# EAGLE board CT_schematic (EAGLE 7.6.0)

Size 100 x 80 mm. Coordinates in mm from the lower left corner, seen from the top.
Outline: 0,0 100,0 100,80 0,80 0,0
Copper layers (1*16): Top 0.035mm / dielectric 1.5mm / Bottom 0.035mm
Design rules "default": minimum track width 10mil, minimum drill 24mil, track to track 8mil, track to pad 8mil, pad to pad 8mil, via to via 8mil, smd to smd 8mil, copper to edge 40mil, drill to drill 8mil, minimum pad ring 10mil, minimum via ring 8mil, stop-mask expansion 4mil, vias tented up to drill 0mil, thermal gap 10mil

## Footprints (pad centres in the part's own frame; a part is rotated, then mirrored left to right if it is on the bottom)
C0603 = smd 0.8 x 0.8: 1 -0.762,0; 2 0.762,0
C0402 = smd 0.5 x 0.5: 1 -0.508,0; 2 0.508,0
EXV-9B = smd 2.718 x 1.778: 1 -2.108,0; 2 2.108,0
EXV-9H = smd 3.505 x 1.676: 1 -2.857,0; 2 2.857,0
L0603 = smd 0.8 x 0.8: 1 -0.762,0; 2 0.762,0
PJ-037B_PACKAGE = drill 3.7 square: 1 12,0 | drill 3.2 square: 2 6,0
R0603 = smd 0.8 x 0.8: 1 -0.762,0; 2 0.762,0
LQFP64 = smd 0.3 x 1.2: 1 -3.75,-5.75; 2 -3.25,-5.75; 3 -2.75,-5.75; 4 -2.25,-5.75; 5 -1.75,-5.75; 6 -1.25,-5.75; 7 -0.75,-5.75; 8 -0.25,-5.75; 9 0.25,-5.75; 10 0.75,-5.75; 11 1.25,-5.75; 12 1.75,-5.75; 13 2.25,-5.75; 14 2.75,-5.75; 15 3.25,-5.75; 16 3.75,-5.75; 33 3.75,5.75; 34 3.25,5.75; 35 2.75,5.75; 36 2.25,5.75; 37 1.75,5.75; 38 1.25,5.75; 39 0.75,5.75; 40 0.25,5.75; 41 -0.25,5.75; 42 -0.75,5.75; 43 -1.25,5.75; 44 -1.75,5.75; 45 -2.25,5.75; 46 -2.75,5.75; 47 -3.25,5.75; 48 -3.75,5.75 | smd 1.2 x 0.3: 17 5.75,-3.75; 18 5.75,-3.25; 19 5.75,-2.75; 20 5.75,-2.25; 21 5.75,-1.75; 22 5.75,-1.25; 23 5.75,-0.75; 24 5.75,-0.25; 25 5.75,0.25; 26 5.75,0.75; 27 5.75,1.25; 28 5.75,1.75; 29 5.75,2.25; 30 5.75,2.75; 31 5.75,3.25; 32 5.75,3.75; 49 -5.75,3.75; 50 -5.75,3.25; 51 -5.75,2.75; 52 -5.75,2.25; 53 -5.75,1.75; 54 -5.75,1.25; 55 -5.75,0.75; 56 -5.75,0.25; 57 -5.75,-0.25; 58 -5.75,-0.75; 59 -5.75,-1.25; 60 -5.75,-1.75; 61 -5.75,-2.25; 62 -5.75,-2.75; 63 -5.75,-3.25; 64 -5.75,-3.75
SOIC-8 = smd 1.6 x 0.6: 1 -2.7,1.905 | smd 1.55 x 0.6: 2 -2.7,0.635; 3 -2.7,-0.635; 4 -2.7,-1.905; 5 2.7,-1.905; 6 2.7,-0.635; 7 2.7,0.635; 8 2.7,1.905
TST-110-05-T-D-RA = drill 1 pad 1.7 square: 1 0,0 | drill 1 pad 1.7: 2 0,2.54; 3 2.54,0; 4 2.54,2.54; 5 5.08,0; 6 5.08,2.54; 7 7.62,0; 8 7.62,2.54; 9 10.16,0; 10 10.16,2.54; 11 12.7,0; 12 12.7,2.54; 13 15.24,0; 14 15.24,2.54; 15 17.78,0; 16 17.78,2.54; 17 20.32,0; 18 20.32,2.54; 19 22.86,0; 20 22.86,2.54
ABS07-32.768KHZ-7-T = smd 1.1 x 2.4: 1 -2.5,0; 2 0,0
ABLS-25.000MHZ-B2F-T = smd 5.6 x 2.8: 1 -3.81,0; 2 5.69,0
LP2954 = smd 1.6 x 0.6: 1 -2.475,1.905 | smd 1.55 x 0.6: 2 -2.475,0.635; 3 -2.475,-0.635; 4 -2.475,-1.905; 5 2.475,-1.905; 6 2.475,-0.635; 7 2.475,0.635; 8 2.475,1.905
SON-6 = smd 0.55 x 0.3: 1 -0.355,0.5 | smd 0.52 x 0.3: 2 -0.37,0; 3 -0.37,-0.5; 4 0.37,-0.5; 5 0.37,0; 6 0.37,0.5
SW_4-1437565-2 = smd 1.4 x 2.1: 1 -2.23,4.55; 2 -2.23,-4.55; 3 2.23,4.55; 4 2.23,-4.55
LGM67K-G1J2-24-Z = smd 0.8 x 1.4: A -2,0; C 0,0
NC7SZ125M5X = smd 1.3 x 0.7: 1 -1.3,0.95; 2 -1.3,0; 3 -1.3,-0.95; 4 1.3,-0.95; 5 1.3,0.95

## Placement (x,y rotation side)
C1  1e-07  [C0603]  -53.34,57.15 0 top  (outside the outline)
C2  1e-07  [C0603]  -57.15,57.15 0 top  (outside the outline)
C3  1e-07  [C0603]  -60.96,57.15 0 top  (outside the outline)
C4  1e-07  [C0603]  -15.24,62.23 0 top  (outside the outline)
C5  4.7e-06  [C0603]  -49.53,57.15 0 top  (outside the outline)
C6  1e-07  [C0603]  -19.05,62.23 0 top  (outside the outline)
C7  1e-08  [C0603]  -22.86,62.23 0 top  (outside the outline)
C8  1e-06  [C0603]  -26.67,62.23 0 top  (outside the outline)
C9  1e-11  [C0402]  -45.72,62.23 0 top  (outside the outline)
C10  1e-11  [C0402]  -49.53,62.23 0 top  (outside the outline)
C11  1e-11  [C0402]  -53.34,62.23 0 top  (outside the outline)
C12  1e-11  [C0402]  -57.15,62.23 0 top  (outside the outline)
C13  1e-08  [C0402]  -60.96,62.23 0 top  (outside the outline)
C14  1e-07  [C0402]  -15.24,67.31 0 top  (outside the outline)
C15  1e-07  [C0402]  -19.05,67.31 0 top  (outside the outline)
C16  1e-06  [EXV-9B]  -30.48,44.45 0 top  (outside the outline)
C17  2.2e-06  [EXV-9B]  -39.37,44.45 0 top  (outside the outline)
C18  1e-07  [C0402]  -22.86,67.31 0 top  (outside the outline)
C19  0.0001  [EXV-9H]  -54.61,30.48 0 top  (outside the outline)
C20  0.0001  [EXV-9H]  -17.78,38.1 0 top  (outside the outline)
C21  1e-08  [C0402]  -26.67,67.31 0 top  (outside the outline)
C22  1e-08  [C0402]  -30.48,67.31 0 top  (outside the outline)
F1  240.0  [L0603]  -30.48,62.23 0 top  (outside the outline)
J1  PJ-037B  [PJ-037B_PACKAGE]  -27.94,7.62 0 top  (outside the outline)
R2  1000.0  [R0603]  -34.29,62.23 0 top  (outside the outline)
R4  4700.0  [R0603]  -38.1,62.23 0 top  (outside the outline)
R5  10000.0  [R0603]  -40.64,52.07 0 top  (outside the outline)
R6  10000.0  [R0603]  -45.72,52.07 0 top  (outside the outline)
R7  10000.0  [R0603]  -50.8,52.07 0 top  (outside the outline)
R8  10000.0  [R0603]  -55.88,52.07 0 top  (outside the outline)
R9  10000.0  [R0603]  -60.96,52.07 0 top  (outside the outline)
R10  10000.0  [R0603]  -15.24,57.15 0 top  (outside the outline)
R11  10000.0  [R0603]  -20.32,57.15 0 top  (outside the outline)
R12  10000.0  [R0603]  -25.4,57.15 0 top  (outside the outline)
R13  10000.0  [R0603]  -30.48,57.15 0 top  (outside the outline)
R14  10000.0  [R0603]  -35.56,57.15 0 top  (outside the outline)
R15  100000.0  [R0603]  -15.24,52.07 0 top  (outside the outline)
R16  100000.0  [R0603]  -20.32,52.07 0 top  (outside the outline)
R17  164658.62  [R0603]  -60.96,44.45 0 top  (outside the outline)
R18  100000.0  [R0603]  -25.4,52.07 0 top  (outside the outline)
R19  10000.0  [R0603]  -40.64,57.15 0 top  (outside the outline)
R20  10000.0  [R0603]  -45.72,57.15 0 top  (outside the outline)
R21  9100.0  [R0603]  -41.91,62.23 0 top  (outside the outline)
R22  680000.0  [R0603]  -30.48,52.07 0 top  (outside the outline)
R23  120000.0  [R0603]  -35.56,52.07 0 top  (outside the outline)
U1  STM32L152RCT6  [LQFP64]  -40.64,7.62 0 top  (outside the outline)
U2  AT25128B-SSHL-T  [SOIC-8]  -60.96,19.05 0 top  (outside the outline)
U3  TST-110-05-T-D-RA  [TST-110-05-T-D-RA]  -46.99,27.94 0 top  (outside the outline)
U4  ABS07-32.768KHZ-7-T  [ABS07-32.768KHZ-7-T]  -59.69,38.1 0 top  (outside the outline)
U5  ABLS-25.000MHZ-B2F-T  [ABLS-25.000MHZ-B2F-T]  -36.83,38.1 0 top  (outside the outline)
U6  LP2954AIMX/NOPB  [LP2954]  -44.45,19.05 0 top  (outside the outline)
U7  TPS3895ADRYR  [SON-6]  -33.02,66.04 0 top  (outside the outline)
U8  4-1437565-2  [SW_4-1437565-2]  -27.94,20.32 0 top  (outside the outline)
U9  Q65110A2395  [LGM67K-G1J2-24-Z]  -17.78,45.72 0 top  (outside the outline)
U10  nc7sz125m5x  [NC7SZ125M5X]  -46.99,44.45 0 top  (outside the outline)
U11  nc7sz125m5x  [NC7SZ125M5X]  -53.34,44.45 0 top  (outside the outline)

## Library data of the parts
C1-C22 F1 J1 R2 R4-R23 U1-U11 = circuit_tree

## Nets
CLK_CRYSTAL_U1_3: C9.1 U1.3 U4.1
CLK_CRYSTAL_U1_4: C10.1 U1.4 U4.2
CLK_CRYSTAL_U1_5: C11.1 U1.5 U5.1
CLK_CRYSTAL_U1_6: C12.1 U1.6 U5.2
GND: C1.2 C2.2 C3.2 C4.2 C5.2 C6.2 C7.2 C8.2 C9.2 C10.2 C11.2 C12.2 C13.2 C14.2 C15.2 C16.2 C17.2 C18.2 C19.2 C20.2 C21.2 C22.2 J1.2 R2.2 R5.2 R14.2 R18.2 R21.2 R23.2 U1.12 U1.18 U1.31 U1.47 U1.63 U2.4 U3.4 U3.6 U3.8 U3.10 U3.12 U3.14 U3.16 U3.18 U3.20 U6.4 U7.2 U9.C U10.2 U10.3 U11.1 U11.3
NET_U1_1: C6.1 U1.1
NET_U1_7: R4.1 U1.7 U11.4
NET_U1_13: C7.1 C8.1 F1.1 U1.13
NET_U1_60: R5.1 U1.60
NET_U1_61: U9.A
NET_U1_62: U8.3 U8.4
NET_U2_3: R6.1 U2.3
NET_U2_7: R8.1 U2.7
NET_U3_19: R14.1 U3.19
NET_U6_3: R16.1 U6.3
NET_U6_5: R15.1 U6.5
NET_U6_7: R17.2 R18.1 U6.7
NET_U7_1: R20.1 R21.1 U7.1
NET_U7_3: R22.2 R23.1 U7.3
NET_U7_4: R19.1 U7.4 U10.4 U11.2
NET_U8_1: R2.1 U8.1 U8.2
PROC_SPI1_MISO: U1.22 U2.2
PROC_SPI1_MOSI: U1.23 U2.5
PROC_SPI1_NSS: R7.1 U1.20 U2.1
PROC_SPI1_SCK: U1.21 U2.6
PROC_SYS_JTCK_SWCLK: R12.1 U1.49 U3.9
PROC_SYS_JTDI: R10.1 U1.50 U3.5
PROC_SYS_JTDO_TRACESWO: U1.55 U3.13
PROC_SYS_JTMS_SWDIO: R11.1 U1.46 U3.7
PROC_SYS_JTRST: R9.1 U1.56 U3.3
RST_OUT_U3_SRESET_B: R13.1 U3.15 U10.1
VCC_S1_9V2: C16.1 C19.1 C20.1 J1.1 R16.2 U6.8
VCC_TIER1_3V3: C1.1 C2.1 C3.1 C4.1 C5.1 C13.1 C14.1 C15.1 C17.1 C18.1 C21.1 C22.1 F1.2 R4.2 R6.2 R7.2 R8.2 R9.2 R10.2 R11.2 R12.2 R13.2 R15.2 R17.1 R19.2 R20.2 R22.1 U1.19 U1.32 U1.48 U1.64 U2.8 U3.1 U3.2 U6.1 U7.6 U10.5 U11.5

## Tracks (layer width: path | path; a pad name or v marks a point on that pad's centre or on a via)
CLK_CRYSTAL_U1_3  (2 unrouted)
CLK_CRYSTAL_U1_4  (2 unrouted)
CLK_CRYSTAL_U1_5  (2 unrouted)
CLK_CRYSTAL_U1_6  (2 unrouted)
GND  (50 unrouted)
NET_U1_1  (1 unrouted)
NET_U1_7  (2 unrouted)
NET_U1_13  (3 unrouted)
NET_U1_60  (1 unrouted)
NET_U1_62  (1 unrouted)
NET_U2_3  (1 unrouted)
NET_U2_7  (1 unrouted)
NET_U3_19  (1 unrouted)
NET_U6_3  (1 unrouted)
NET_U6_5  (1 unrouted)
NET_U6_7  (2 unrouted)
NET_U7_1  (2 unrouted)
NET_U7_3  (2 unrouted)
NET_U7_4  (3 unrouted)
NET_U8_1  (2 unrouted)
PROC_SPI1_MISO  (1 unrouted)
PROC_SPI1_MOSI  (1 unrouted)
PROC_SPI1_NSS  (2 unrouted)
PROC_SPI1_SCK  (1 unrouted)
PROC_SYS_JTCK_SWCLK  (2 unrouted)
PROC_SYS_JTDI  (2 unrouted)
PROC_SYS_JTDO_TRACESWO  (1 unrouted)
PROC_SYS_JTMS_SWDIO  (2 unrouted)
PROC_SYS_JTRST  (2 unrouted)
RST_OUT_U3_SRESET_B  (2 unrouted)
VCC_S1_9V2  (5 unrouted)
VCC_TIER1_3V3  (37 unrouted)